# Altium PCB LED_PCB.PcbDoc (part 2 of 3)
Units mil, origin at the board's own origin, x right, y up, seen from the top; angles counter-clockwise.
Board outline 8000 x 4000 mil, 2 copper layers (Top Layer, Bottom Layer); 186 components, 303 nets, 1412 pads, 346 vias.
Unrouted connection lines stored in the file: 5.
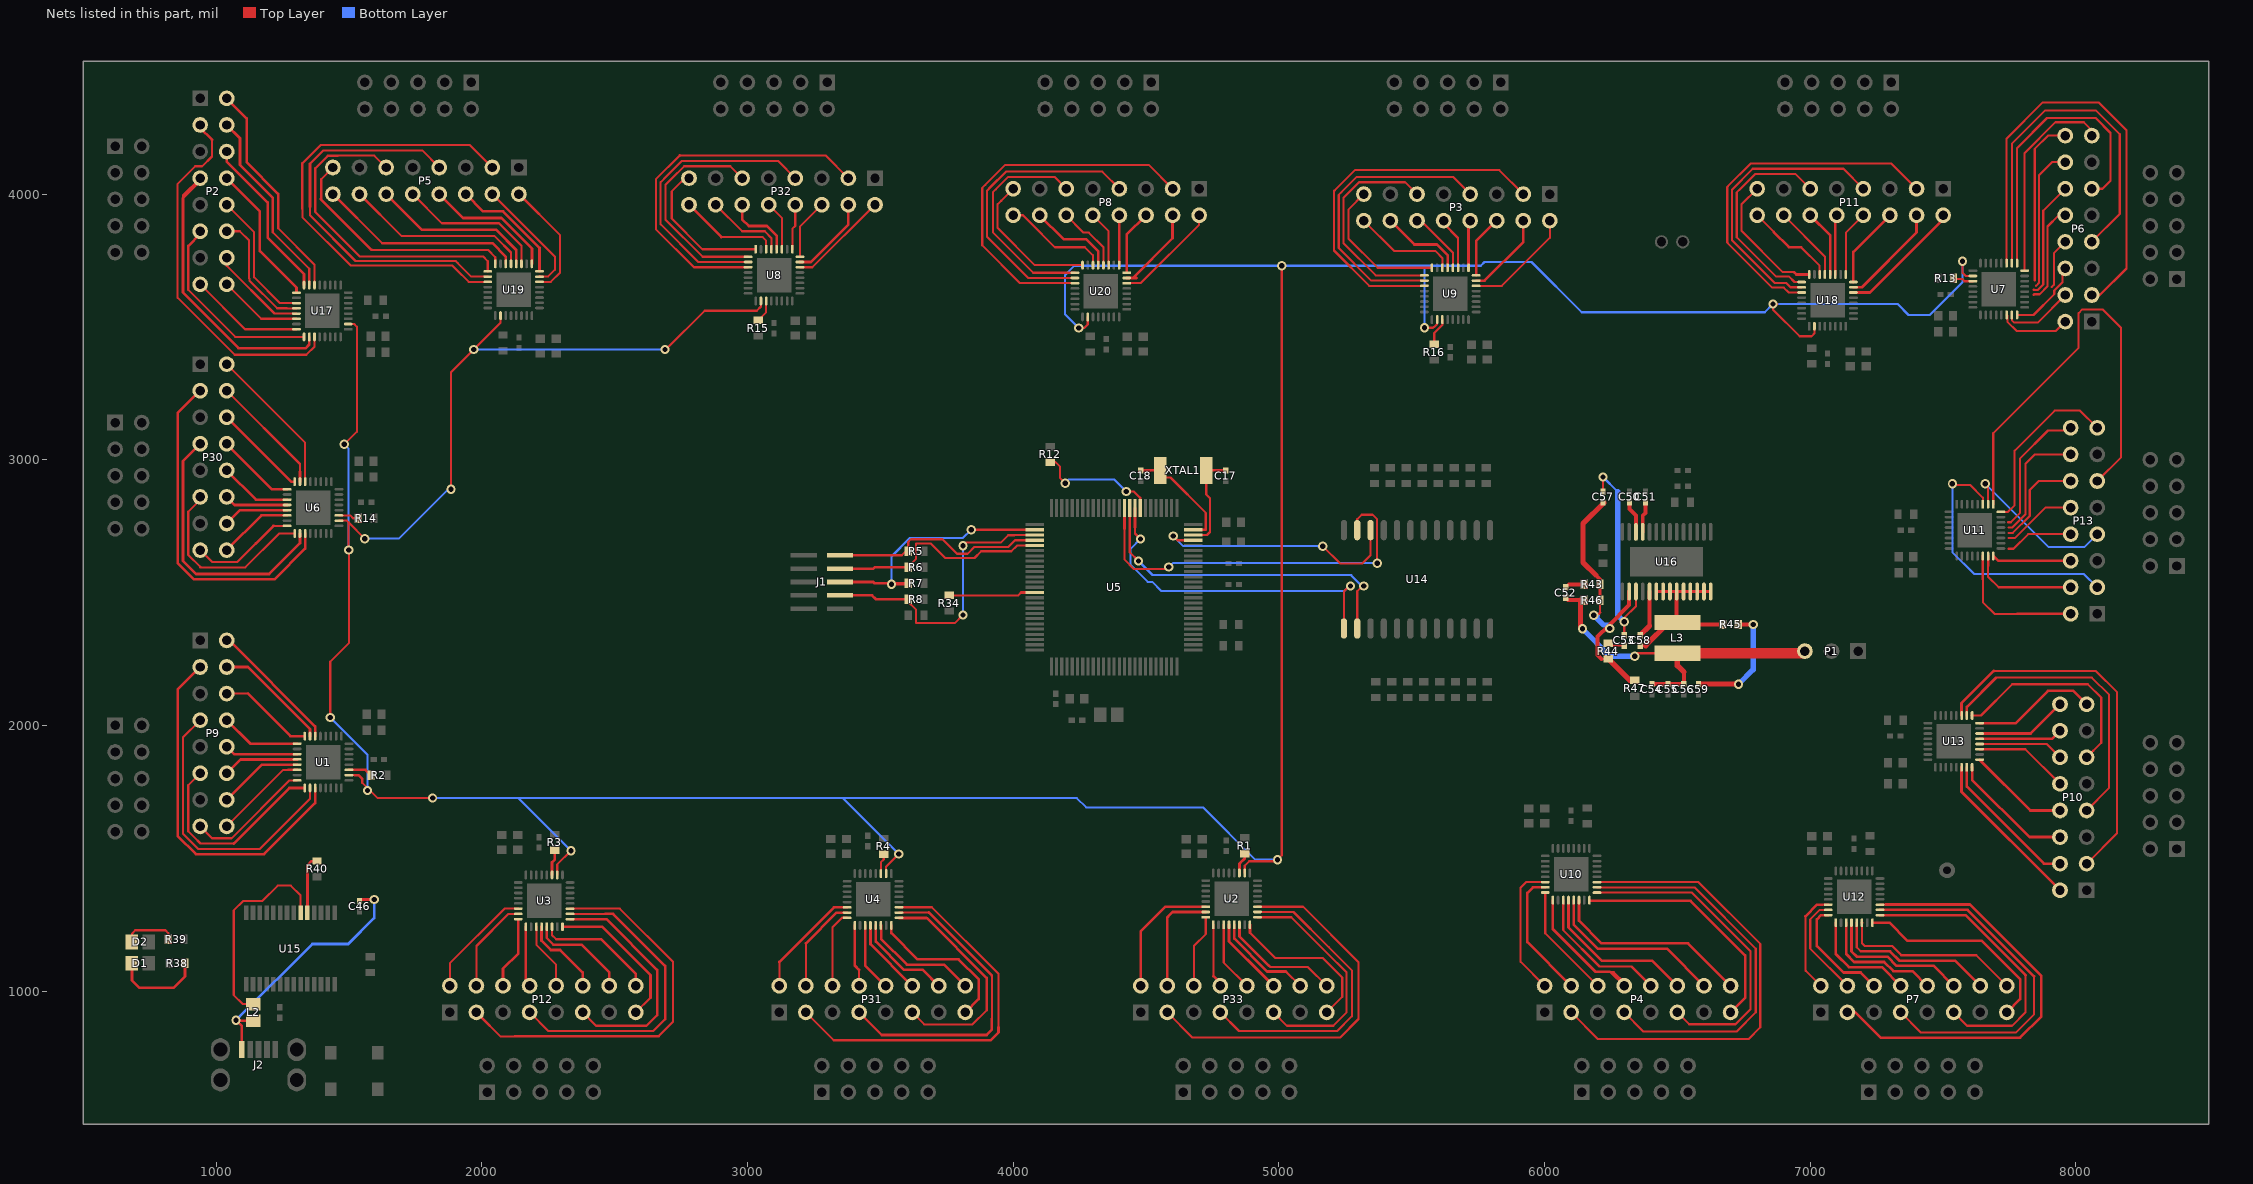
[diagram p2: the nets of this part, all layers, seen from the top]

## Via types
v1: diameter 35, hole 20, Top Layer to Bottom Layer, 334 vias
v2: diameter 25.98, hole 12.99, Top Layer to Bottom Layer, tented top, 12 vias

## Nets (pads, with @x,y where several pads share a name; then routed paths per layer and width w, separated by ;. In a path a pad name is that pad's centre, name@x,y a point inside that pad or via, vN(x,y) a via of type N, cw(c..) or ccw(c..) an arc to the next point about the centre after c; other vN are vias at no path point) (continued)
JTAG_TCK: J1.4 R6.1 U5.80 | length 850
  Top Layer w8: R6.1@3605.47,2595 3605.47,2598 3635,2627.53 3635,2684.72 3690,2684.72 3744.34,2630.38 3854.5,2630.38 3879.68,2655.56 3992.89,2655.56 4014.81,2677.48 U5.80@4081.77,2677.48
  Top Layer w10: J1.4@3348.11,2590.39 3474,2590.39 3478.61,2595 R6.1@3605.47,2595
JTAG_TDI: J1.8 R8.1 U5.78 | length 1219.6
  Top Layer w8: J1.8@3348.11,2489.61 3469,2489.61 ; R8.1@3600.24,2469.76 3635,2435 3635,2385.28 3780.28,2385.28 v1(3811,2416) ; v1(3811,2676) 3823,2688 3953,2688 3981,2716 4005.15,2716 4006,2716.85 U5.78@4081.77,2716.85
  Top Layer w10: J1.8@3348.11,2489.61 3469,2489.61 3483.61,2475 R8.1@3605.47,2475
  Bottom Layer w8: v1(3811,2416) v1(3811,2676)
JTAG_TDO: J1.6 R7.1 U5.77 | length 1013.3
  Top Layer w8: v1(3542,2531) 3605.47,2531 R7.1@3605.47,2535 ; v1(3841.91,2736.54) U5.77@4081.77,2736.54
  Top Layer w10: J1.6@3348.11,2540 3474,2540 3479,2535 3542,2535 R7.1@3605.47,2535
  Bottom Layer w8: v1(3542,2531) 3542,2636 3611.5,2705.5 3810.87,2705.5 v1(3841.91,2736.54)
JTAG_TMS: J1.2 R5.1 U5.79 | length 817.7
  Top Layer w8: J1.2@3348.11,2640.79 3580.79,2640.79 3605,2665 3605,2689.28 3604.28,2690 3615,2700.72 3734.33,2700.72 3788.67,2646.38 3828.88,2646.38 3854.06,2671.56 3981.36,2671.56 4006.97,2697.17 U5.79@4081.77,2697.17
LED_BLUE_0: P2.4 U17.7 | length 932
  Top Layer w8: P2.4@1040,4260 1090,4210 ; 1213.99,3986.01 1213.99,3856.01 1350.79,3719.21 U17.7@1350.79,3657.44
  Top Layer w10: P2.4@1040,4260 1090,4210 1090,4110 1213.99,3986.01 1213.99,3856.01
LED_BLUE_1: P2.8 U17.9 | length 539.9
  Top Layer w10: P2.8@1040,4060 1165,3935 1165,3785 1302.56,3647.44 U17.9@1302.56,3628.9
LED_BLUE_2: P2.12 U17.12 | length 506.1
  Top Layer w8: P2.12@1040,3860 1089.77,3860 1124.5,3825.27 1124.5,3797.78 1124,3797.28 1124,3683.37 1125.53,3681.84 1125.53,3674.47 1230,3570 1230.16,3569.84 1265.16,3569.84 U17.12@1302.56,3569.84
  Top Layer w10: 1230,3570 1265,3570 1265.16,3569.84
LED_BLUE_3: P2.16 U17.14 | length 316.2
  Top Layer w8: P2.16@1040,3660 1169.53,3530.47 U17.14@1302.56,3530.47
LED_BLUE_4: P5.4 U19.7 | length 455
  Top Layer w8: P5.4@2040,4000 2275,3765 2275,3715 2250,3690 2249.21,3689.21 U19.7@2217.44,3689.21
  Top Layer w10: P5.4@2040,4000 P5.4@2043.28,4000 ; U19.7@2217.44,3689.21 U19.7@2218.23,3690
LED_BLUE_5: P5.8 U19.9 | length 634.7
  Top Layer w10: P5.8@1840,4000 1930,3910 ; 2073.28,3910 1930,3910 ; U19.9@2188.9,3737.44 2188.9,3795 2073.9,3910 1930,3910
LED_BLUE_6: P5.12 U19.12 | length 629.5
  Top Layer w10: P5.12@1640,4000 1775,3865 2055,3865 2129.84,3790.16 U19.12@2129.84,3737.44
LED_BLUE_7: P5.16 U19.14 | length 802.2
  Top Layer w8: P5.16@1440,4000 1625,3815 2039.69,3815 ; U19.14@2090.47,3737.44 2090.47,3764.53
  Top Layer w10: 2039.69,3815 2090.16,3764.53 2090.47,3764.53 U19.14@2090.47,3737.44
LED_BLUE_8: P8.4 U20.7 | length 468.3
  Top Layer w8: U20.7@4427.44,3684.21 4451.06,3684.21 4600,3833.15 P8.4@4600,3920
  Top Layer w10: 4451.06,3684.21 U20.7@4427.44,3684.21 4464.21,3684.21 ; 4600,3833.15 P8.4@4600,3920
LED_BLUE_9: P8.8 U20.9 | length 188
  Top Layer w10: U20.9@4398.9,3732.44 4398.9,3918.9 P8.8@4400,3920
LED_BLUE_10: P8.12 U20.12 | length 257.2
  Top Layer w8: P8.12@4200,3920 4265,3855 4285,3855 4339.84,3800.16 U20.12@4339.84,3732.44
LED_BLUE_11: P8.16 U20.14 | length 400.6
  Top Layer w8: P8.16@4000,3920 4037.03,3920 4061.56,3895.47 4157.03,3800 4270,3800 4300,3770 4300.47,3769.53 U20.14@4300.47,3732.44
  Top Layer w10: U20.14@4300,3732.91 U20.14@4300.47,3732.44
LED_BLUE_12: P11.4 U18.7 | length 387.8
  Top Layer w10: U18.7@7162.44,3649.21 7194.21,3649.21 7400,3855 P11.4@7400,3920
LED_BLUE_13: P11.8 U18.9 | length 249.9
  Top Layer w8: U18.9@7133.9,3697.44 7133.9,3853.9 P11.8@7200,3920
LED_BLUE_14: P11.12 U18.12 | length 253.6
  Top Layer w10: P11.12@7000,3920 7074.84,3845.16 U18.12@7074.84,3697.44
LED_BLUE_15: P11.16 U18.14 | length 346.5
  Top Layer w8: P11.16@6800,3920 6862.1,3857.9 ; 6965,3800 7035.47,3729.53 U18.14@7035.47,3697.44
  Top Layer w10: 6862.1,3857.9 6920,3800 6965,3800
LED_BLUE_16: P30.4 U6.7 | length 493.6
  Top Layer w8: P30.4@1040,3260 1315.79,2984.21 1315.79,2954.21 U6.7@1315.79,2917.44
  Top Layer w10: U6.7@1315.79,2917.44 1315.79,2954.21
LED_BLUE_17: P30.8 U6.9 | length 298.4
  Top Layer w10: P30.8@1040,3060 1211.1,2888.9 U6.9@1267.56,2888.9
LED_BLUE_18: P30.12 U6.12 | length 240.1
  Top Layer w10: P30.12@1040,2860 1070.16,2829.84 U6.12@1267.56,2829.84
LED_BLUE_19: P30.16 U6.14 | length 281.6
  Top Layer w10: P30.16@1040,2660 1170.47,2790.47 U6.14@1267.56,2790.47
LED_BLUE_20: P32.4 U8.7 | length 315.9
  Top Layer w10: U8.7@3197.44,3744.21 3239.21,3744.21 3380,3885 P32.4@3380,3960
LED_BLUE_21: P32.8 U8.9 | length 172.2
  Top Layer w8: U8.9@3168.9,3792.44 3168.9,3868.9 3180,3880 P32.8@3180,3960
LED_BLUE_22: P32.12 U8.12 | length 312.3
  Top Layer w8: U8.12@3109.84,3792.44 3109.84,3843.44
  Top Layer w10: P32.12@2980,3960 2980,3905 3005,3880 3073.28,3880 3109.84,3843.44 U8.12@3109.84,3792.44
LED_BLUE_23: P32.16 U8.14 | length 551
  Top Layer w8: P32.16@2780,3960 2901.82,3838.18 3056.82,3838.18 3060,3835 3070.47,3824.53 U8.14@3070.47,3792.44
  Top Layer w10: P32.16@2780,3960 2901.82,3838.18
LED_BLUE_24: P3.4 U9.7 | length 317.9
  Top Layer w10: U9.7@5742.44,3674.21 5774.21,3674.21 5920,3820 P3.4@5920,3900
LED_BLUE_25: P3.8 U9.9 | length 180.1
  Top Layer w10: U9.9@5713.9,3722.44 5713.9,3893.9 P3.8@5720,3900
LED_BLUE_26: P3.12 U9.12 | length 242.2
  Top Layer w8: P3.12@5520,3900 5535,3900 5654.84,3780.16 U9.12@5654.84,3722.44
LED_BLUE_27: P3.16 U9.14 | length 390.7
  Top Layer w8: P3.16@5320,3900 5435,3785 5590,3785 5615.47,3759.53 U9.14@5615.47,3722.44
LED_BLUE_28: P6.4 U7.7 | length 267.9
  Top Layer w8: U7.7@7758.74,3545 7758.74,3525.26 7768,3516 7856,3516 P6.4@7960,3620
LED_BLUE_29: P6.8 | length 192.8
  Top Layer w8: 7909,3650.36 7917,3658.36 7917,3777 ; 7917,3775 7917,3777 ; P6.8@7960,3820 7917,3777
LED_BLUE_30: P6.12 | length 440.9
  Top Layer w8: 7840,3640 7842.37,3640 7843.37,3639 7856.63,3639 7877,3659.37 7877,3937 P6.12@7960,4020
LED_BLUE_31: P6.16 | length 630.7
  Top Layer w8: 7845,3675 7845,4170 7895,4220 P6.16@7960,4220
LED_BLUE_32: P9.4 U1.7 | length 437.1
  Top Layer w10: P9.4@1040,2220 1120,2220 1353.54,1986.46 U1.7@1353.54,1959.68
LED_BLUE_33: P9.8 U1.9 | length 302.1
  Top Layer w10: P9.8@1040,2020 1128.86,1931.14 U1.9@1305.32,1931.14
LED_BLUE_34: P9.12 U1.12 | length 286.9
  Top Layer w10: P9.12@1040,1820 1092.09,1872.09 U1.12@1305.32,1872.09
LED_BLUE_35: P9.16 U1.14 | length 406
  Top Layer w8: P9.16@1040,1620 1252.72,1832.72 1272.72,1832.72 U1.14@1305.32,1832.72
  Top Layer w10: P9.16@1040,1620 P9.16@1060,1620 ; 1272.72,1832.72 U1.14@1305.32,1832.72
LED_BLUE_36: P12.4 U3.7 | length 357.6
  Top Layer w8: P12.4@1980,1020 1980,1170 2100.79,1290.79 U3.7@2137.56,1290.79
LED_BLUE_37: P12.8 U3.9 | length 228.3
  Top Layer w10: U3.9@2166.1,1242.56 2166.1,1033.9 P12.8@2180,1020
LED_BLUE_38: P12.12 U3.12 | length 307.2
  Top Layer w10: U3.12@2225.16,1242.56 2225.16,1189.84 2260,1155 2295,1155 2380,1070 P12.12@2380,1020
LED_BLUE_39: P12.16 U3.14 | length 577.8
  Top Layer w8: U3.14@2264.53,1242.56 2264.53,1210.47 2280,1195 2405,1195
  Top Layer w10: 2280,1195 2405,1195 2450,1195 2580,1065 P12.16@2580,1020
LED_BLUE_40: P31.4 U4.7 | length 566.4
  Top Layer w8: P31.4@3220,1020 3220,1180 3335.47,1295.47 3335.79,1295.79 U4.7@3375.32,1295.79
  Top Layer w10: 3220,1180 3335.47,1295.47 U4.7@3375.32,1295.47
LED_BLUE_41: P31.8 U4.9 | length 408.6
  Top Layer w8: U4.9@3403.86,1247.56 3403.86,1096.14 3420,1080 P31.8@3420,1020
  Top Layer w10: U4.9@3403.62,1247.56 3403.62,1096.38 3403.86,1096.14 3420,1080
LED_BLUE_42: P31.12 U4.12 | length 292.8
  Top Layer w10: U4.12@3462.91,1247.56 3463.23,1247.56 3463.23,1176.77 P31.12@3620,1020
LED_BLUE_43: P31.16 U4.14 | length 441.7
  Top Layer w10: U4.14@3502.28,1247.56 3503.23,1247.56 3503.23,1196.77 3600,1100 3740,1100 P31.16@3820,1020
LED_BLUE_44: P33.4 U2.7 | length 410.8
  Top Layer w10: P33.4@4580,1020 4580,1277.72 4588.65,1286.37 4600,1297.72 U2.7@4724.8,1297.72
LED_BLUE_45: P33.8 U2.9 | length 230.8
  Top Layer w8: 4753.35,1056.65 U2.9@4753.35,1249.8
  Top Layer w10: 4753.35,1056.65 P33.8@4780,1030
LED_BLUE_46: P33.12 U2.12 | length 410.8
  Top Layer w8: 4812.4,1187.6 U2.12@4812.4,1249.8 ; 4945.07,1054.93 P33.12@4980,1020
  Top Layer w10: U2.12@4812.4,1249.8 4812.4,1187.6 4945.07,1054.93 P33.12@4980,1020
LED_BLUE_47: P33.16 U2.14 | length 492.3
  Top Layer w8: 4851.77,1206.2 U2.14@4851.77,1249.8 ; 4963.28,1095 4967.36,1090.93 5109.07,1090.93 P33.16@5180,1020
  Top Layer w10: U2.14@4852.09,1249.8 4852.09,1206.2 4963.28,1095
LED_BLUE_48: P4.4 U10.7 | length 494.5
  Top Layer w10: U10.7@6002.56,1390.79 5955.79,1390.79 5935,1370 5935,1185 P4.4@6100,1020
LED_BLUE_49: P4.8 U10.9 | length 870
  Top Layer w8: U10.9@6031.1,1342.56 6031.1,1233.9 6031.1,1232 6190.1,1073 6192,1073 6247,1073 6250,1070 P4.8@6300,1020
  Top Layer w10: U10.9@6031.1,1342.56 6031.1,1233.9 6192,1073 ; 6250,1070 6260,1070 P4.8@6300,1030
LED_BLUE_50: P4.12 U10.12 | length 603.6
  Top Layer w10: U10.12@6090.16,1342.56 6090.16,1239.84 6215,1115 6405,1115 P4.12@6500,1020
LED_BLUE_51: P4.16 U10.14 | length 749.2
  Top Layer w10: U10.14@6129.53,1342.56 6129.53,1265.47 6215,1180 6540,1180 P4.16@6700,1020
LED_BLUE_52: P7.4 U12.7 | length 390.4
  Top Layer w8: U12.7@7067.56,1305.79 7035.79,1305.79 7000,1270 7000,1160 P7.4@7140,1020
LED_BLUE_53: P7.8 U12.9 | length 411.8
  Top Layer w10: U12.9@7096.1,1257.56 7096.1,1138.9 7145,1090 7270,1090 P7.8@7340,1020
LED_BLUE_54: P7.12 U12.12 | length 546.3
  Top Layer w10: U12.12@7155.16,1257.56 7155.16,1149.84 7175,1130 7290,1130 7325,1095 7465,1095 P7.12@7540,1020
LED_BLUE_55: P7.16 U12.14 | length 689.7
  Top Layer w8: U12.14@7194.53,1257.56 7194.53,1180.47 7205,1170 7308.28,1170 7343.28,1135 ; 7625,1135 P7.16@7740,1020
  Top Layer w10: U12.14@7194.53,1257.56 U12.14@7195,1257.09 ; 7343.28,1135 7625,1135
LED_BLUE_56: P10.4 U13.7 | length 543.2
  Top Layer w10: U13.7@7589.21,1842.56 7589.53,1842.56 7589.53,1770.47 7880,1480 P10.4@7940,1480
LED_BLUE_57: P10.8 U13.9 | length 381.9
  Top Layer w10: U13.9@7637.44,1871.1 7637.44,1870.87 7828.31,1680 P10.8@7940,1680
LED_BLUE_58: P10.12 U13.12 | length 323.3
  Top Layer w8: U13.12@7637.44,1930.16 7679.84,1930.16 7889.84,1930.16 P10.12@7940,1880
LED_BLUE_59: P10.16 U13.14 | length 348.3
  Top Layer w10: U13.14@7637.44,1969.53 7829.53,1969.53 P10.16@7940,2080
LED_BLUE_60: P13.4 U11.7 | length 672
  Top Layer w8: U11.7@7669.21,2637.56 7669.21,2560 7709.21,2520 7750,2520 P13.4@7980,2520
  Top Layer w10: 7669.53,2600.47 U11.7@7669.53,2637.56 ; 7750,2520 P13.4@7980,2520
LED_BLUE_61: P13.8 | length 256.6
  Top Layer w8: 7746.17,2665 7765,2665 7820,2720 P13.8@7980,2720
LED_BLUE_62: P13.12 | length 371.8
  Top Layer w8: 7746.17,2725 7762.63,2725 7826,2788.37 7826,2886 7860,2920 P13.12@7980,2920
LED_BLUE_63: P13.16 | length 502.1
  Top Layer w8: 7745,2765 7755,2765 7790,2800 7790,3005 7895,3110 7970,3110 P13.16@7980,3120
LED_GREEN_0: P2.3 U17.19 | length 1391.1
  Top Layer w8: 984.53,4204.53 984.53,4141.56 947.5,4104.53 921.56,4104.53 855.47,4038.44 855.47,3609.53 1070,3395 1340,3395 1370.47,3425.47 U17.19@1370.47,3462.56
  Top Layer w10: P2.3@940,4260 940,4249.06 984.53,4204.53
LED_GREEN_1: P2.7 U17.18 | length 1789
  Top Layer w8: P2.7@940,4060 875.47,3995.47 875.47,3984.53 875.47,3629.53 1071.98,3433.02 ; 1350.79,3433.02 U17.18@1350.79,3462.56
  Top Layer w10: P2.7@940,4060 940,4049.06 875.47,3984.53 875.47,3629.53 1071.98,3433.02 1084.21,3420.79 ; 1084.21,3420 1337.77,3420 1350.79,3433.02
LED_GREEN_2: P2.11 U17.17 | length 912.8
  Top Layer w8: 895.47,3804.53 895.47,3639.53 1072.44,3462.56 U17.17@1331.1,3462.56
  Top Layer w10: 895.47,3639.53 895.47,3804.53 940,3849.06 P2.11@940,3860
LED_GREEN_3: P2.15 U17.16 | length 432.5
  Top Layer w8: P2.15@940,3660 1108.9,3491.1 U17.16@1302.56,3491.1
LED_GREEN_4: P5.3 U19.19 | length 1949.1
  Top Layer w8: U19.19@2022.56,3669.53 1950.47,3669.53 1902.07,3717.93 1889,3731 1539,3731 1507.29,3731 1325,3913.29 1325,3945 1325,4115 1394.53,4184.53 1955.47,4184.53 P5.3@2040,4100
  Top Layer w10: 1325,3945 1325,4115
LED_GREEN_5: P5.7 U19.18 | length 1654.7
  Top Layer w8: P5.7@1840,4100 1775.47,4164.53 1404.53,4164.53 1353.44,4113.44 1353.44,3951.56 1353.44,3919.59 1525.03,3748 1557,3748 1902,3748 1910,3740 1960.79,3689.21 U19.18@2022.56,3689.21
  Top Layer w10: 1353.44,3951.56 1353.44,4113.44
LED_GREEN_6: P5.11 U19.17 | length 1404.9
  Top Layer w8: P5.11@1640,4100 1595.47,4144.53 1458.44,4144.53 1421.56,4144.53 1373.44,4096.42 1373.44,3961.56 1373.44,3932.57 1541.02,3765 1570,3765 2005,3765 2022.56,3747.44 U19.17@2022.56,3708.9
  Top Layer w10: 1373.44,3961.56 1373.44,4096.42 ; 1421.56,4144.53 1458.44,4144.53
LED_GREEN_7: P5.15 U19.16 | length 1279.5
  Top Layer w8: P5.15@1440,4100 1395.47,4055.47 1395.47,3979.53 1585,3790 2023.69,3790 2051.1,3762.58 U19.16@2051.1,3737.44
  Top Layer w10: 1393.44,3981.56 1395.47,3979.53 1585,3790 ; 1395.47,3981.56 1395.47,4055.47 ; U19.16@2051.1,3737.44 2051.1,3762.58
LED_GREEN_8: P8.3 U20.19 | length 1413.9
  Top Layer w8: U20.19@4232.56,3664.53 4100.47,3664.53 4025.8,3664.53 3883.66,3806.67 3883.66,4023.2 3895,4034.54 3970.46,4110 4510,4110 P8.3@4600,4020
LED_GREEN_9: P8.7 U20.18 | length 1123.2
  Top Layer w8: U20.18@4232.56,3684.21 4115.79,3684.21 4057.3,3684.21 3901.66,3839.86 3901.66,4012.91 3915,4026.26 3973.27,4084.53 4335.47,4084.53 P8.7@4400,4020
LED_GREEN_10: P8.11 U20.17 | length 841.6
  Top Layer w8: P8.11@4200,4020 4155.47,4064.53 3981.56,4064.53 3935,4017.97 3923.47,4006.44 3923.47,3856 4075.57,3703.9 4124.85,3703.9 U20.17@4232.56,3703.9
LED_GREEN_11: P8.15 U20.16 | length 549.7
  Top Layer w8: P8.15@4000,4020 3955,3975 3941.47,3961.47 3941.47,3872 4081.03,3732.44 4187.44,3732.44 U20.16@4261.1,3732.44
LED_GREEN_12: P11.3 U18.19 | length 1355.8
  Top Layer w8: U18.19@6967.56,3629.53 6919.02,3629.53 6900.55,3648 6857,3648 6690,3815 6687.47,3817.53 6687.47,4027.01 6690,4029.54 6775.46,4115 7305,4115 P11.3@7400,4020
LED_GREEN_13: P11.7 U18.18 | length 1084.4
  Top Layer w8: U18.18@6967.56,3649.21 6925.79,3649.21 6910,3665 6865.94,3665 6705.47,3825.47 6705.47,4016.73 6783.74,4095 7125,4095 P11.7@7200,4020
LED_GREEN_14: P11.11 U18.17 | length 810.7
  Top Layer w8: U18.17@6967.56,3668.9 6940.55,3668.9 6919.45,3690 6870.7,3690 6723.47,3837.22 6723.47,4006.44 6735.47,4018.44 6792.03,4075 6945,4075 P11.11@7000,4020
LED_GREEN_15: P11.15 U18.16 | length 547.3
  Top Layer w8: P11.15@6800,4020 6741.47,3961.47 6741.47,3861.47 6896.95,3706 6939,3706 ; 6965.11,3697.44 U18.16@6996.1,3697.44
  Top Layer w10: P11.15@6800,4009.06 P11.15@6800,4020 ; 6939,3706 6947.56,3697.44 6965.11,3697.44 U18.16@6996.1,3697.44
LED_GREEN_16: P30.3 U6.19 | length 1294.1
  Top Layer w10: P30.3@940,3260 855.47,3175.47 855.47,2611.24 916.72,2550 1220,2550 1335.47,2665.47 U6.19@1335.47,2722.56
LED_GREEN_17: P30.7 U6.18 | length 1012.8
  Top Layer w10: P30.7@940,3060 875.47,2995.47 875.47,2619.53 925,2570 1200,2570 1315.79,2685.79 U6.18@1315.79,2722.56
LED_GREEN_18: P30.11 U6.17 | length 713.7
  Top Layer w8: P30.11@940,2860 940,2849.06 895.47,2804.53 895.47,2641.56 940,2597.03 942.03,2595 1110,2595 1237.56,2722.56 U6.17@1296.1,2722.56
  Top Layer w10: 940,2597.03 940,2595 942.03,2595
LED_GREEN_19: P30.15 U6.16 | length 402.2
  Top Layer w8: P30.15@940,2660 984.53,2615.47 1080.47,2615.47 1150,2685 ; 1216.1,2751.1 U6.16@1267.56,2751.1
  Top Layer w10: 1150,2685 1216.1,2751.1
LED_GREEN_20: P32.3 U8.19 | length 1392.1
  Top Layer w8: U8.19@3002.56,3724.53 2867.65,3724.53 2798.74,3724.53 2655.2,3868.07 2655.2,4055.2 2745,4145 3295,4145 P32.3@3380,4060
  Top Layer w10: 2745,4144.54 2745,4145 ; 2867.65,3724.53 2867.96,3724.21
LED_GREEN_21: P32.7 U8.18 | length 1113.2
  Top Layer w8: U8.18@3002.56,3744.21 2876.25,3744.21 2815.06,3744.21 2673.2,3886.07 2673.2,4044.46 2695.47,4066.73 2753.27,4124.53 3115.47,4124.53 P32.7@3180,4060
LED_GREEN_22: P32.11 U8.17 | length 835.9
  Top Layer w8: P32.11@2980,4060 2935.47,4104.53 2761.56,4104.53 2715.47,4058.44 2691.2,4034.18 2691.2,3904.07 2831.37,3763.9 2884.85,3763.9 U8.17@3002.56,3763.9
LED_GREEN_23: P32.15 U8.16 | length 583.9
  Top Layer w8: P32.15@2780,4075 2715,4010 2715,3907.94 2830.5,3792.44 U8.16@3031.1,3792.44
  Top Layer w10: P32.15@2780,4049.06 P32.15@2780,4075
LED_GREEN_24: P3.3 U9.19 | length 1401.5
  Top Layer w8: U9.19@5547.56,3654.53 5370.47,3654.53 5340.42,3654.53 5207.47,3787.47 5207.47,4011.54 5215.47,4019.54 5285.93,4090 5830,4090 P3.3@5920,4000
LED_GREEN_25: P3.7 U9.18 | length 1122.2
  Top Layer w8: U9.18@5547.56,3674.21 5400.79,3674.21 5347.93,3674.21 5225.47,3796.67 5225.47,3996.73 5235.47,4006.73 5293.27,4064.53 5655.47,4064.53 P3.7@5720,4000
LED_GREEN_26: P3.11 U9.17 | length 844.9
  Top Layer w8: P3.11@5520,4000 5475.47,4044.53 5301.56,4044.53 5255.47,3998.44 5243.47,3986.44 5243.47,3814.67 5364.24,3693.9 5421.1,3693.9 U9.17@5547.56,3693.9
LED_GREEN_27: P3.15 U9.16 | length 562.8
  Top Layer w8: P3.15@5320,4000 5261.47,3941.47 5261.47,3832.67 5371.7,3722.44 5427.56,3722.44 U9.16@5576.1,3722.44
  Top Layer w10: P3.15@5320,3989.06 P3.15@5320,4000
LED_GREEN_28: P6.3 U7.19 | length 1711.3
  Top Layer w8: U7.19@7739.06,3739.88 7739.06,4209.06 7875,4345 8085,4345 8190,4240 8190,3720 8090,3620 P6.3@8060,3620
LED_GREEN_29: P6.7 U7.18 | length 1398.9
  Top Layer w8: U7.18@7758.74,3739.88 7758.74,4015 ; 7758.74,4020.74 7758.74,4015 ; P6.7@8060,3820 8165,3925 8165,4225 8075,4315 7885,4315 7758.74,4188.74 7758.74,4015
LED_GREEN_30: P6.11 U7.17 | length 1123.4
  Top Layer w8: U7.17@7778.43,3739.88 7778.43,3930 ; 7778.43,3936 7778.43,3930 ; P6.11@8060,4020 8100,4020 8130,4050 8130,4230 8074,4286 7891,4286 7778.43,4173.43 7778.43,3930
LED_GREEN_31: P6.15 U7.16 | length 776.5
  Top Layer w8: U7.16@7806.97,3711.34 7806.97,4154.6 7922.37,4270 8030,4270 8060,4240 P6.15@8060,4220
LED_GREEN_32: P9.3 U1.19 | length 1353.6
  Top Layer w10: P9.3@940,2220 855.47,2135.47 855.47,1583.99 923.99,1515.47 1180.47,1515.47 1373.23,1708.23 U1.19@1373.23,1764.8
LED_GREEN_33: P9.7 U1.18 | length 1086.2
  Top Layer w8: P9.7@940,2020 875.47,1955.47 875.47,1944.53 875.47,1592.27 932.27,1535.47 1165.47,1535.47 1353.54,1723.54 U1.18@1353.54,1764.8
  Top Layer w10: P9.7@940,2009.06 P9.7@940,2020
LED_GREEN_34: P9.11 U1.17 | length 779.7
  Top Layer w8: 915.51,1581.51 895.47,1601.56 895.47,1775.47 P9.11@940,1820 ; 916.51,1580.51 941.56,1555.47 1066.73,1555.47
  Top Layer w10: 1066.73,1555.47 1276.06,1764.8 U1.17@1333.86,1764.8
LED_GREEN_35: P9.15 U1.16 | length 474
  Top Layer w8: P9.15@940,1620 984.53,1575.47 1021.56,1575.47 1058.44,1575.47 1276.32,1793.35 U1.16@1305.32,1793.35
LED_GREEN_36: P12.3 U3.19 | length 2106.4
  Top Layer w8: P12.3@1980,920 2030,870 2070,830 2125,830 2665,830 2720,885 2720,1110 2519.53,1310.47 U3.19@2332.44,1310.47
  Top Layer w10: P12.3@1980,920 2030,870 ; 2125,830 2665,830
LED_GREEN_37: P12.7 U3.18 | length 1368.1
  Top Layer w8: P12.7@2180,920 2250,850 2645,850 2690,895 2690,1066.8 ; U3.18@2332.44,1290.79 2466.01,1290.79
  Top Layer w10: 2466.01,1290.79 2494.21,1290.79 2690,1095 2690,1066.8 2690,895
LED_GREEN_38: P12.11 U3.17 | length 1146.7
  Top Layer w8: U3.17@2332.44,1271.1 2442,1271.1 ; P12.11@2380,920 2430,870 2620,870 2660,910 2660,1053.1
  Top Layer w10: U3.17@2332.44,1271.1 2442,1271.1 2468.9,1271.1 2660,1080 2660,1053.1 2660,910
LED_GREEN_39: P12.15 U3.16 | length 763
  Top Layer w8: U3.16@2303.9,1242.56 2432.44,1242.56 ; P12.15@2580,920 2635,975 2635,1040
  Top Layer w10: U3.16@2303.9,1242.56 2432.44,1242.56 2452.44,1242.56 2635,1060 2635,1040 2635,975
LED_GREEN_40: P31.3 U4.19 | length 1485
  Top Layer w8: P31.3@3220,920 3325,815 3330,815 ; U4.19@3570.2,1315.47 3570.51,1315.79 3694.21,1315.79 3945,1065 3945,864
  Top Layer w10: 3325,815 3915,815 3945,845 3945,864 ; U4.19@3570.2,1315.79 U4.19@3570.51,1315.79
LED_GREEN_41: P31.7 U4.18 | length 1530.8
  Top Layer w8: P31.7@3420,920 3505,835 ; U4.18@3570.2,1295.79 3682.5,1295.79 3920,1058.28 3920,896
  Top Layer w10: 3505,835 3900,835 3920,855 3920,896 ; 3682.5,1295.79 3920,1058.28
LED_GREEN_42: P31.11 U4.17 | length 1410.2
  Top Layer w8: U4.17@3570.2,1276.1 3673.9,1276.1 3675,1275 3900,1050 3900,928 3847,875 3665,875 P31.11@3620,920
  Top Layer w10: U4.17@3571.06,1275 3675,1275 3900,1050 3900,928
LED_GREEN_43: P31.15 U4.16 | length 575.1
  Top Layer w10: U4.16@3541.65,1247.56 3541.65,1218.35 3640,1120 3795,1120 3870,1045 3870,970 P31.15@3820,920
LED_GREEN_44: P33.3 U2.19 | length 1516.9
  Top Layer w8: P33.3@4580,920 4675,825 5230,825 5300,895 5300,1109.01 5091.3,1317.72 4967.29,1317.72 U2.19@4919.69,1317.72
  Top Layer w10: U2.19@4919.69,1318.03 4966.97,1318.03 4967.29,1317.72
LED_GREEN_45: P33.7 U2.18 | length 1166.4
  Top Layer w8: P33.7@4780,920 4850,850 5220,850 5275,905 5275,1078.28 5188.28,1165 5055.25,1298.03 4956.97,1298.03 U2.18@4919.69,1298.03
LED_GREEN_46: P33.11 U2.17 | length 888
  Top Layer w8: U2.17@4919.69,1278.35 5046.65,1278.35 5180,1145 5255,1070 5255,920 5205,870 5030,870 P33.11@4980,920
LED_GREEN_47: P33.15 U2.16 | length 632.6
  Top Layer w8: U2.16@4891.14,1249.8 4891.14,1220.13 4891.38,1219.89 4986.34,1124.93 5165.07,1124.93 5235,1055 5238.53,1051.47 5238.53,978.53 P33.15@5180,920
  Top Layer w10: 4891.38,1219.89 U2.16@4891.38,1249.8
LED_GREEN_48: P4.3 U10.19 | length 1796.5
  Top Layer w8: P4.3@6100,920 6200,820 6768,820 6812,864 6812,1178 6579.53,1410.47 U10.19@6197.44,1410.47
LED_GREEN_49: P4.7 U10.18 | length 1487.8
  Top Layer w8: U10.18@6197.44,1390.79 6564.21,1390.79 6795,1160 6795,920 6723,848 6372,848 P4.7@6300,920
LED_GREEN_50: P4.11 U10.17 | length 1204
  Top Layer w8: U10.17@6197.44,1371.1 6553.9,1371.1 6775,1150 6775,932.03 6718.44,875.47 6544.53,875.47 P4.11@6500,920
LED_GREEN_51: P4.15 U10.16 | length 911.4
  Top Layer w10: U10.16@6168.9,1342.56 6168.9,1340 6550,1340 6755,1135 6755,975 P4.15@6700,920
LED_GREEN_52: P7.3 U12.19 | length 1671
  Top Layer w8: U12.19@7262.44,1325.47 7281,1325.47
  Top Layer w10: P7.3@7140,920 7170,920 7265,825 7790,825 7870,905 7870,1056.57 7600.7,1325.87 7283.13,1325.87
LED_GREEN_53: P7.7 U12.18 | length 2072.1
  Top Layer w8: U12.18@7262.44,1305.79 7592.5,1305.79 7842.5,1055.78 7842.5,912.5 7775,845 7415,845 P7.7@7340,920
  Top Layer w10: U12.18@7262.44,1305.87 7592.42,1305.87 7592.5,1305.79 7842.5,1055.78
LED_GREEN_54: P7.11 U12.17 | length 1733.7
  Top Layer w8: U12.17@7262.44,1286.1 7583.9,1286.1 7584.13,1285.87 7810,1060 7810,920 7760,870 7590,870 P7.11@7540,920
  Top Layer w10: U12.17@7262.44,1285.87 7584.13,1285.87 7810,1060
LED_GREEN_55: P7.15 U12.16 | length 789.9
  Top Layer w10: U12.16@7233.9,1257.56 7297.44,1257.56 7365,1190 7645,1190 7790,1045 7790,970 P7.15@7740,920
LED_GREEN_56: P10.3 U13.19 | length 1625.8
  Top Layer w8: U13.19@7569.53,2037.44 7569.53,2084.53 7690,2205 8075,2205 8155,2125 8155,1595 P10.3@8040,1480
  Top Layer w10: U13.19@7569.21,2037.44 7569.21,2084.21 7569.53,2084.53 7690,2205
LED_GREEN_57: P10.7 U13.18 | length 1299
  Top Layer w8: U13.18@7589.21,2037.44 7589.21,2069.21 7700,2180 8060,2180 8125,2115 8125,1765 P10.7@8040,1680
  Top Layer w10: U13.18@7589.21,2037.44 7589.21,2069.21 7700,2180
LED_GREEN_58: P10.11 U13.17 | length 803.5
  Top Layer w8: U13.17@7608.9,2037.44 7642.44,2037.44 7760,2155 8045,2155 8095,2105 8095,1935 8065,1905 P10.11@8040,1880
  Top Layer w10: U13.17@7608.9,2037.44 U13.17@7609.13,2037.44
LED_GREEN_59: P10.15 U13.16 | length 473.4
  Top Layer w10: U13.16@7637.44,2008.9 7773.9,2008.9 7895,2130 7990,2130 P10.15@8040,2080
LED_GREEN_60: P13.3 U11.19 | length 1016.9
  Top Layer w8: v1@7535,2905 7602,2905 7649.53,2857.47 U11.19@7649.53,2832.44
  Bottom Layer w8: v1(7535,2910) 7535,2652 7617,2570 8030,2570 P13.3@8080,2520
LED_GREEN_61: P13.7 U11.18 | length 622.1
  Top Layer w8: v1(7659,2910) 7669.21,2899.79 U11.18@7669.21,2832.44
  Bottom Layer w8: v1(7659,2910) 7898,2671 8031,2671 P13.7@8080,2720
LED_GREEN_62: P13.11 U11.17 | length 1660.6
  Top Layer w8: U11.17@7688.9,2832.44 7688.9,3100 8010,3421.1 8010,3552 8024,3566 8100,3566 8170,3496 8170,3010 P13.11@8080,2920
LED_GREEN_63: P13.15 U11.16 | length 667.5
  Top Layer w8: U11.16@7717.44,2803.9 7744,2803.9 7769,2828.9 7769,3034 7920,3185 8015,3185 P13.15@8080,3120
LED_MODE: U1.26 U2.26 U3.26 U4.26 U6.26 U7.26 U8.26 U9.26 U17.26 U18.26 U19.26 U20.26 | length 15842.3
  Top Layer w8: v1(1430,2030) 1430,2240 1500,2310 v1(1500,2660) ; U6.26@1462.44,2770.79 1492,2770.79 1499,2763.79 ; v1(1483,3058) 1530,3105 1530,3500.79 1520,3510.79 U17.26@1497.44,3510.79 ; v1@1499,2660 1499,2763.79 ; U1.26@1500.2,1813.03 1521.97,1813.03 ; 1550,1785 1608.36,1726.64 v1(1815,1726.64) ; v1(1559.79,2703) 1499,2763.79 ; v1(1884,2889) 1884,3329.21 2070.79,3516 U19.26@2070.79,3542.56 ; U3.26@2284.21,1437.44 2284.21,1477 v1(2336,1528.79) ; v1(2690,3415) 2693,3415 2839,3561 3035,3561 3050.79,3576.79 U8.26@3050.79,3597.56 ; U4.26@3521.97,1442.44 3521.97,1469 v1(3569,1516.03) ; v1(4247,3496) 4267.79,3496 4280.79,3509 U20.26@4280.79,3537.56 ; U2.26@4871.46,1444.68 4871.46,1472 4888.46,1489 4989,1489 v1(4995,1495) 5011,1511 v1(5011,3730) ; v1(5548,3497) 5580,3497 5582,3499 5584,3499 5595.79,3510.79 U9.26@5595.79,3527.56 ; v1(6860,3586) 6876,3586 6860,3570 6860,3565 6960,3465 7005,3465 7015.79,3475.79 U18.26@7015.79,3502.56 ; v1(7573,3747) 7573,3703.65 7585,3691.65 U7.26@7612.09,3691.65
  Top Layer w10: 1521.97,1813.03 1536.97,1813.03 1550,1800 1550,1785
  Bottom Layer w8: v1(1430,2030) 1570,1890 v1(1570,1755) ; v1(1483,3058) 1499,3042 v1@1499,2660 ; v1(1559.79,2703) 1688,2703 1874,2889 v1(1884,2889) ; v1@1824.64,1717 v1(1815,1726.64) 2138.15,1726.64 ; v1(1970,3415) v1(2690,3415) ; v1(2336,1528.79) 2138.15,1726.64 ; 3360.02,1725.02 v1(3569,1516.03) ; v1(4247,3496) 4195,3548 4195,3695 4230,3730 v1(5011,3730) 5760,3730 5774.23,3744.23 5950.77,3744.23 6140,3555 6829,3555 v1(6860,3586) 7329,3586 7370,3545 7450,3545 7573,3668 v1(7573,3747) ; v1(4995,1495) 4911,1495 4714.49,1691.51 4274.49,1691.51 4239.36,1726.64 2138.15,1726.64 ; v1(5548,3497) 5548,3727
LED_RED_0: P2.2 U17.6 | length 1075.5
  Top Layer w8: P2.2@1040,4360 1115,4285 ; 1233.99,4001.01 1233.99,3871.01 1370.47,3734.53 U17.6@1370.47,3657.44
  Top Layer w10: P2.2@1040,4360 1115,4285 1115,4120 1233.99,4001.01 1233.99,3871.01
LED_RED_1: P2.6 U17.8 | length 991.3
  Top Layer w8: 1193.99,3968.99 1193.99,3836.01 1330.79,3699.21 1331.1,3698.9 U17.8@1331.1,3657.44
  Top Layer w10: P2.6@1040,4160 1040,4122.97 1193.99,3968.99 1193.99,3836.01 1330.79,3699.21 U17.8@1330.79,3657.44
LED_RED_2: P2.10 U17.11 | length 515.6
  Top Layer w8: P2.10@1040,3960 1143.53,3856.47 1143.53,3686.47 1240.47,3589.53 U17.11@1302.56,3589.53
LED_RED_3: P2.14 U17.13 | length 366.9
  Top Layer w8: P2.14@1040,3760 1040,3730.32 1220.16,3550.16 U17.13@1302.56,3550.16
LED_RED_4: P5.2 U19.6 | length 451.5
  Top Layer w8: P5.2@2140,4000 2295,3845 2295,3780 2295,3705 2259.53,3669.53 U19.6@2217.44,3669.53
LED_RED_5: P5.6 U19.8 | length 450
  Top Layer w10: P5.6@1940,4000 2005,3935 2080,3935 2217.44,3797.56 U19.8@2217.44,3708.9
LED_RED_6: P5.10 U19.11 | length 558.1
  Top Layer w8: P5.10@1740,4000 1850,3890 2065,3890 2149.53,3805.47 U19.11@2149.53,3737.44
LED_RED_7: P5.14 U19.13 | length 703.8
  Top Layer w8: P5.14@1540,4000 1698.5,3841.5 2048.66,3841.5 2055.16,3835 2110.16,3780 U19.13@2110.16,3737.44
LED_RED_8: P8.2 U20.6 | length 398.9
  Top Layer w8: U20.6@4427.44,3664.53 4479.53,3664.53 4700,3885 P8.2@4700,3920
LED_RED_9: P8.6 U20.8 | length 246.2
  Top Layer w10: U20.8@4427.44,3703.9 4427.44,3847.44 P8.6@4500,3920
LED_RED_10: P8.10 U20.11 | length 212.2
  Top Layer w8: P8.10@4300,3920 4359.53,3860.47 U20.11@4359.53,3732.44
LED_RED_11: P8.14 U20.13 | length 335.9
  Top Layer w10: P8.14@4100,3920 4190,3830 4275,3830 4320.16,3784.84 U20.13@4320.16,3732.44 U20.13@4320.16,3739.84
LED_RED_12: P11.2 U18.6 | length 513.8
  Top Layer w8: U18.6@7162.44,3629.53 7209.53,3629.53
  Top Layer w10: U18.6@7162.44,3629.53 7209.53,3629.53 7224.53,3629.53 7500,3905 P11.2@7500,3920
LED_RED_13: P11.6 U18.8 | length 308.1
  Top Layer w10: U18.8@7162.44,3668.9 7162.44,3782.44 P11.6@7300,3920
LED_RED_14: P11.10 U18.11 | length 224.8
  Top Layer w10: U18.11@7094.53,3697.44 7094.53,3914.53 P11.10@7100,3920
LED_RED_15: P11.14 U18.13 | length 286.8
  Top Layer w8: P11.14@6900,3920 7055.16,3764.84 U18.13@7055.16,3697.44
LED_RED_16: P30.2 U6.6 | length 575.9
  Top Layer w8: P30.2@1040,3360 1335.47,3064.53 1335.47,3053.58 U6.6@1335.47,2917.44
  Top Layer w10: P30.2@1040,3349.06 P30.2@1040,3360
LED_RED_17: P30.6 U6.8 | length 356.6
  Top Layer w10: P30.6@1040,3160 1282.56,2917.44 U6.8@1296.1,2917.44
LED_RED_18: P30.10 U6.11 | length 273.3
  Top Layer w10: P30.10@1040,2960 1150.47,2849.53 U6.11@1267.56,2849.53
LED_RED_19: P30.14 U6.13 | length 248.3
  Top Layer w10: P30.14@1040,2760 1090.16,2810.16 U6.13@1267.56,2810.16
LED_RED_20: P32.2 U8.6 | length 385.1
  Top Layer w8: U8.6@3197.44,3724.53 3244.53,3724.53 P32.2@3480,3960
  Top Layer w10: P32.2@3480,3955 P32.2@3480,3960
LED_RED_21: P32.6 U8.8 | length 238.6
  Top Layer w8: U8.8@3197.44,3763.9 3197.44,3869.16 3197.44,3877.44 P32.6@3280,3960
  Top Layer w10: P32.6@3280,3951.72 P32.6@3280,3960
LED_RED_22: P32.10 U8.11 | length 188.1
  Top Layer w8: P32.10@3080,3960 3129.53,3910.47 U8.11@3129.53,3792.44
LED_RED_23: P32.14 U8.13 | length 304.4
  Top Layer w8: P32.14@2880,3960 2980,3860 3065,3860 3090.16,3834.84 U8.13@3090.16,3792.44
LED_RED_24: P3.2 U9.6 | length 417.3
  Top Layer w8: U9.6@5742.44,3654.53 5839.53,3654.53 6020,3835 P3.2@6020,3900
LED_RED_25: P3.6 U9.8 | length 238.2
  Top Layer w10: U9.8@5742.44,3693.9 5742.44,3822.44 P3.6@5820,3900
LED_RED_26: P3.10 U9.11 | length 200.1
  Top Layer w8: P3.10@5620,3900 5620,3889.06 5674.53,3834.53 U9.11@5674.53,3722.44
LED_RED_27: P3.14 U9.13 | length 316.7
  Top Layer w10: P3.14@5420,3900 5510,3810 5595.32,3810 5635.16,3770.16 U9.13@5635.16,3722.44
LED_RED_28: P6.2 U7.6 | length 273.6
  Top Layer w8: U7.6@7739.06,3545 7741.82,3542.24 7741.82,3519.55 7776.43,3484.94 7924.94,3484.94 P6.2@7960,3520
LED_RED_29: P6.6 U7.8 | length 286.3
  Top Layer w8: U7.8@7778.43,3545 7840,3545 7918.47,3623.47 7918.47,3637.2 7950,3668.73 7950,3710 P6.6@7960,3720
LED_RED_30: P6.10 | length 376.2
  Top Layer w8: 7840,3620 7843,3623 7863.25,3623 7893,3652.75 7893,3878 7935,3920 P6.10@7960,3920
LED_RED_31: P6.14 | length 539.9
  Top Layer w8: 7850,3655 7861,3666 7861,4071 7910,4120 P6.14@7960,4120
LED_RED_32: P9.2 U1.6 | length 504.2
  Top Layer w10: P9.2@1040,2320 1050,2320 1373.23,1996.77 U1.6@1373.23,1959.68
LED_RED_33: P9.6 U1.8 | length 360.3
  Top Layer w8: P9.6@1040,2120 1120,2120
  Top Layer w10: 1120,2120 1280.32,1959.68 U1.8@1333.86,1959.68
LED_RED_34: P9.10 U1.11 | length 277
  Top Layer w10: P9.10@1040,1920 1068.23,1891.77 U1.11@1305.32,1891.77
LED_RED_35: P9.14 U1.13 | length 320.2
  Top Layer w10: P9.14@1040,1720 1172.4,1852.4 U1.13@1305.32,1852.4
LED_RED_36: P12.2 U3.6 | length 427.7
  Top Layer w8: P12.2@1880,1020 1880,1105 2085.47,1310.47 U3.6@2137.56,1310.47
LED_RED_37: P12.6 U3.8 | length 339.9
  Top Layer w8: P12.6@2080,1020 2080,1085
  Top Layer w10: P12.6@2080,1020 2080,1085 2137.56,1142.56 U3.8@2137.56,1271.1
LED_RED_38: P12.10 U3.11 | length 253.4
  Top Layer w8: U3.11@2205.47,1242.56 2205.47,1174.53 2280,1100 P12.10@2280,1020
LED_RED_39: P12.14 U3.13 | length 436.5
  Top Layer w8: U3.13@2244.84,1242.56 2244.84,1200.16 2270,1175 2325,1175
  Top Layer w10: 2270,1175 2325,1175 2375,1175 2480,1070 P12.14@2480,1020
LED_RED_40: P31.2 U4.6 | length 770.9
  Top Layer w8: P31.2@3120,1020 3120,1110 3325.47,1315.47 U4.6@3375.32,1315.47
  Top Layer w10: 3120,1110 3325.47,1315.47 U4.6@3375.32,1315.47
LED_RED_41: P31.6 U4.8 | length 290.3
  Top Layer w8: P31.6@3320,1020 3320,1240 3356.1,1276.1 U4.8@3375.32,1276.1
LED_RED_42: P31.10 U4.11 | length 410.1
  Top Layer w10: P31.10@3520,1020 3443.23,1096.77 ; 3443.23,1096.77 U4.11@3443.23,1247.56 3443.23,1096.77
LED_RED_43: P31.14 U4.13 | length 367.3
  Top Layer w10: U4.13@3482.6,1247.56 3483.23,1247.56 3483.23,1186.77 3590,1080 3660,1080 P31.14@3720,1020
LED_RED_44: P33.2 U2.6 | length 799
  Top Layer w8: P33.2@4480,1020 4480,1212 ; 4585.72,1317.72 U2.6@4724.8,1317.72
  Top Layer w10: P33.2@4480,1020 4480,1212 4480,1225 4572.72,1317.72 4704.51,1317.72
LED_RED_45: P33.6 U2.8 | length 276.9
  Top Layer w8: P33.6@4680,1020 4680,1170 4724.8,1214.8 U2.8@4724.8,1278.35
LED_RED_46: P33.10 U2.11 | length 266
  Top Layer w8: U2.11@4792.72,1249.8 4792.72,1107.28 P33.10@4880,1020
LED_RED_47: P33.14 U2.13 | length 445.1
  Top Layer w8: 4955,1072.93 5027.07,1072.93 P33.14@5080,1020
  Top Layer w10: 4832.09,1197.91 U2.13@4832.09,1249.8 ; 4832.4,1197.6 4956.07,1073.93 5026.07,1073.93 5027.07,1072.93
LED_RED_48: P4.2 U10.6 | length 508.3
  Top Layer w8: P4.2@6000,1020 5910,1110 5910,1390 5930,1410 5930.47,1410.47 5965.47,1410.47 U10.6@6002.56,1410.47
LED_RED_49: P4.6 U10.8 | length 432.9
  Top Layer w8: U10.8@6002.56,1371.1 6002.56,1217.44 P4.6@6200,1020
LED_RED_50: P4.10 U10.11 | length 628.3
  Top Layer w8: U10.11@6070.47,1342.56 6070.47,1229.53 6207,1093 6327,1093 6330,1090 P4.10@6400,1020
  Top Layer w10: 6330,1090 P4.10@6400,1020
LED_RED_51: P4.14 U10.13 | length 677.9
  Top Layer w10: U10.13@6109.84,1342.56 6109.84,1250.16 6200,1160 6460,1160 P4.14@6600,1020
LED_RED_52: P7.2 U12.6 | length 406.7
  Top Layer w8: 6981.5,1078.5 6981.5,1281.5 ; 6983,1077 P7.2@7040,1020 ; 7028.47,1325.47 U12.6@7067.56,1325.47
  Top Layer w10: 6981.5,1281.5 7025.47,1325.47 7047.26,1325.47
LED_RED_53: P7.6 U12.8 | length 426.4
  Top Layer w10: U12.8@7067.56,1286.1 7041.1,1286.1 7025,1270 7025,1170 7125,1070 7190,1070 P7.6@7240,1020
LED_RED_54: P7.10 U12.11 | length 538.8
  Top Layer w10: U12.11@7135.47,1257.56 7135.47,1140 7165.47,1110 7278.28,1110 7313.28,1075 7385,1075 ; 7318.03,1075 7385,1075 ; P7.10@7440,1020 7385,1075
LED_RED_55: P7.14 U12.13 | length 752
  Top Layer w8: U12.13@7174.84,1257.56 7174.84,1165.16 7190,1150 7300,1150 ; 7545,1115 P7.14@7640,1020
  Top Layer w10: 7300,1150 7335,1115 7545,1115 P7.14@7640,1020
LED_RED_56: P10.2 U13.6 | length 616
  Top Layer w10: U13.6@7569.53,1842.56 7569.53,1750.47 P10.2@7940,1380
LED_RED_57: P10.6 U13.8 | length 467.4
  Top Layer w10: U13.8@7608.9,1842.56 7609.53,1842.56 7609.53,1795.47 7825,1580 P10.6@7940,1580
LED_RED_58: P10.10 U13.11 | length 356.6
  Top Layer w8: U13.11@7637.44,1910.47 7669.53,1910.47 7809.53,1910.47 P10.10@7940,1780
LED_RED_59: P10.14 U13.13 | length 315
  Top Layer w10: U13.13@7637.44,1949.84 7909.84,1949.84 P10.14@7940,1980
LED_RED_60: P13.2 U11.6 | length 809.3
  Top Layer w8: U11.6@7649.53,2637.56 7649.53,2550.47 7649.53,2464 7693.53,2420 7780,2420 P13.2@7980,2420
  Top Layer w10: 7649.53,2550.47 U11.6@7649.53,2637.56 ; 7780,2420 P13.2@7980,2420
LED_RED_61: P13.6 U11.8 | length 298.4
  Top Layer w10: U11.8@7688.9,2637.56 7689.53,2637.56 7707.09,2620 P13.6@7980,2620
LED_RED_62: P13.10 | length 281.5
  Top Layer w8: 7746.17,2705 7770,2705 7885,2820 P13.10@7980,2820
LED_RED_63: P13.14 | length 459
  Top Layer w8: 7746.17,2745 7760,2745 7810,2795 7810,2985 7845,3020 P13.14@7980,3020
MUX_A: U5.47 U14.10 | length 970.8
  Top Layer w8: v1(4602,2713.17) 4618,2697.17 U5.47@4678.23,2697.17 ; v1(5165,2675) 5230,2610 5315,2610 5345,2640 U14.10@5345,2735.04
  Bottom Layer w8: v1(4602,2713.17) 4640.17,2675 5147,2675 v1@5156,2666
MUX_B: U5.61 U14.11 | length 1541.1
  Top Layer w8: U5.61@4419.37,2818.23 4419.37,2624 4454.37,2589 4579,2589 v1(4586,2596) ; U14.11@5295,2735.04 5295,2776 5312,2793 5353,2793 5370,2776 v1(5370,2611)
  Top Layer w10: 4419.37,2740.63 U5.61@4419.37,2818.23
  Bottom Layer w8: v1(4586,2596) 4601,2611 v1(5370,2611)
MUX_C: U5.60 U14.14 | length 1350.6
  Top Layer w8: U5.60@4439.06,2818.23 4439.06,2651.94 v1(4472,2619) ; U14.14@5295,2364.96 5295,2505 5306,2516 v1(5320,2525)
  Top Layer w10: 4439.06,2740.94 U5.60@4439.06,2818.23
  Bottom Layer w8: v1(4472,2619) 4524.5,2566.5 5272.36,2566.5 5272.36,2564.36 5311.72,2525 v1(5320,2525)
MUX_D: U5.59 U14.13 | length 1359.1
  Top Layer w8: U5.59@4458.74,2818.23 4458.74,2722.26 v1(4479,2702) ; U14.13@5245,2364.96 5245,2505 5265,2525 v1(5270,2525)
  Top Layer w10: 4458.74,2746.26 U5.59@4458.74,2818.23
  Bottom Layer w8: v1(4479,2702) 4442,2665 4442,2605 4506.5,2540.5 4523.04,2540.5 4557.54,2506 5246,2506 5265,2525 v1(5270,2525)
NetC17_2: C17.2 U5.48 XTAL1.1 | length 378.9
  Top Layer w8: U5.48@4678.23,2716.85 4729.85,2716.85 4741,2728 4741,2854.6 4726.61,2868.99 XTAL1.1@4726.61,2960
  Top Layer w10: XTAL1.1@4726.61,2960 4763,2960 4763.31,2959.69 C17.2@4800,2959.69
NetC18_2: C18.2 U5.49 XTAL1.2 | length 437.5
  Top Layer w8: XTAL1.2@4553.39,2960 4553.39,2933 4592,2933 4725,2800 4725,2736.54 U5.49@4678.23,2736.54
  Top Layer w10: C18.2@4480,2959.69 4516,2959.69 4516.31,2960 XTAL1.2@4553.39,2960
NetC46_2: C46.2 J2.1 L2.1 | length 972.3
  Top Layer w10: v1(1075,890) v1@1076.5,888.5 ; J2.1@1097.01,780 1097.01,867.99 v1@1076.5,888.5 ; L2.1@1140,888.5 v1@1076.5,888.5 ; C46.2@1540,1339.69 1545.31,1345 v1(1595,1345)
  Bottom Layer w10: v1@1087,902 1362.54,1177.54 1497.54,1177.54 1595,1275 v1(1595,1345)
NetC50_1: C50.1 U16.26 | length 156.1
  Top Layer w8: U16.26@6343.98,2728.58 6343.98,2763.02
  Top Layer w15: C50.1@6320,2840.32 6320,2815 6343.98,2791.02 U16.26@6343.98,2728.58
NetC51_1: C51.1 U16.25 | length 116.1
  Top Layer w15: U16.25@6369.57,2728.58 6369.57,2789.57 6380,2800 C51.1@6380,2840.32
NetC52_1: C52.1 C54.2 C55.2 C56.2 L3.2 P1.3 R46.2 | length 1370.6
  Top Layer w8: C52.1@6080,2480.32 C52.1@6088.94,2471.38 ; v1(6143,2364) v1@6149.61,2370.61 ; v1@6340,2271.75 L3.2@6500,2271.75 L3.2@6558,2271.75 ; P1.3@6971.75,2271.75 P1.3@6980,2280
  Top Layer w15: C52.1@6088.94,2471.38 R46.2@6149.61,2471.38 ; C54.2@6404.13,2156.06 C55.2@6464.13,2156.06 C56.2@6524.13,2156.06 6524.13,2201
  Top Layer w20: v1@6135,2370 6135,2470.77 ; L3.2@6500,2271.75 6500,2225.13 6524.13,2201
  Top Layer w40: L3.2@6500,2271.75 P1.3@6971.75,2271.75
  Bottom Layer w20: v1(6143,2364) 6247,2260 v1(6340,2260)
NetC52_2: C52.2 R43.2 | length 74.4
  Top Layer w8: C52.2@6080,2519.69 6091.69,2531.38
  Top Layer w15: 6091.69,2531.38 R43.2@6149.61,2531.38
NetC53_1: C53.1 C57.1 U16.3 | length 816.2
  Top Layer w8: C57.1@6220,2879.68 v1(6220,2935) ; C53.1@6300,2339.68 v1(6300,2390) 6300,2405 6343.98,2448.98 U16.3@6343.98,2504.17
  Bottom Layer w8: v1(6220,2935) 6275,2880
  Bottom Layer w20: 6275,2880 6275,2415 v1(6300,2390)
NetC53_2: C53.2 R44.1 | length 63.8
  Top Layer w8: R44.1@6240,2309.53 6249.21,2300.31 C53.2@6300,2300.31
NetC57_2: C57.2 R43.1 R44.2 R46.1 R47.2 U16.2 | length 1066.7
  Top Layer w8: v1(6185,2415) 6198.28,2415 6203,2419.72 6204.72,2419.72 6210,2425 6208.66,2426.34 R46.1@6208.66,2471.38 R46.1@6208.5,2471.22 ; 6214.53,2250.47 R44.2@6240,2250.47 ; v1@6240,2375 6245,2375 v1(6245,2365) ; 6320.94,2169.53 R47.2@6340,2169.53
  Top Layer w10: R46.1@6208.66,2471.38 R43.1@6208.66,2531.38
  Top Layer w15: 6192.66,2566 6208.66,2550 ; 6214.53,2250.47 6200,2265 6200,2335 6240,2375 6318.39,2453.39 U16.2@6318.39,2504.17
  Top Layer w20: 6192.66,2566 6145,2613.66 6145,2760 C57.2@6222.66,2837.66 ; R44.2@6240,2250.47 6320.94,2169.53
  Bottom Layer w8: v1(6245,2365) v1@6245,2377.72
  Bottom Layer w20: v1(6185,2415) 6198.28,2415 6191.64,2408.36 6222.28,2377.72 v1@6245,2377.72
NetC58_1: C58.1 U16.5 | length 179.5
  Top Layer w8: 6395,2375 6395.32,2375 ; 6395,2434.68 6395.16,2434.84
  Top Layer w15: 6395,2375 6395,2434.68 ; 6395.16,2434.84 U16.5@6395.16,2504.17
  Top Layer w20: C58.1@6360,2339.68 6395.32,2375
NetC58_2: C58.2 L3.1 R45.2 U16.6 U16.7 U16.8 U16.9 U16.10 U16.11 U16.12 U16.13 U16.14 | length 712.2
  Top Layer w8: C58.2@6360,2300.31 6380.31,2300.31 ; L3.1@6468.25,2388.25 6497.52,2388.25 L3.1@6500,2388.25 L3.1@6540,2388.25 ; L3.1@6548.25,2380 L3.1@6540,2388.25 ; L3.1@6581.28,2388.25 L3.1@6540,2388.25
  Top Layer w10: U16.6@6420.75,2504.17 U16.7@6446.34,2504.17 U16.8@6471.93,2504.17 U16.9@6497.52,2504.17 U16.10@6523.11,2504.17 U16.11@6548.7,2504.17 U16.12@6574.29,2504.17 U16.13@6599.88,2504.17 U16.14@6625.47,2504.17
  Top Layer w15: L3.1@6497.52,2388.25 U16.9@6497.52,2504.17 ; L3.1@6548.25,2380 R45.2@6670.47,2380
  Top Layer w20: 6380.31,2300.31 L3.1@6468.25,2388.25
NetC59_2: C59.2 R45.1 | length 454.6
  Top Layer w8: v1@6728.94,2156.06 v1(6730,2155)
  Top Layer w15: R45.1@6729.53,2380 v1(6785,2380)
  Top Layer w20: C59.2@6579.13,2156.06 v1@6728.94,2156.06
  Bottom Layer w20: v1(6730,2155) 6785,2210 v1(6785,2380)
NetD1_2: D1.2 R38.2 | length 343.7
  Top Layer w10: D1.2@683.5,1105 683.5,1040 711.22,1012.28 840.26,1012.28 883.03,1055.06 R38.2@883.03,1105
NetD2_2: D2.2 R39.2 | length 201.5
  Top Layer w8: D2.2@683.5,1185 683.5,1216.5 696,1229 810,1229 820.47,1218.53 R39.2@820.47,1195
NetD3_3: R40.2 U15.19 | length 221.7
  Top Layer w10: U15.19@1343.98,1294.45 1343.98,1473.5 1360,1489.53 R40.2@1380,1489.53
NetL2_2: L2.2 U15.20 | length 778
  Top Layer w8: L2.2@1140,951.5 1100,951.5 1066.5,985 1066.5,1304.13 1101.79,1339.42 1175,1339.42 1175,1339.81 1232.19,1397 1281.39,1397 1318.39,1360 U15.20@1318.39,1294.45
NetR1_2: R1.2 U2.27 | length 119.1
  Top Layer w8: U2.27@4851.77,1444.68 4851.77,1470.27 4852.09,1470.59 4853.68,1472.18 4853.68,1481.6
  Top Layer w10: U2.27@4852.09,1444.68 4852.09,1470.59 4852.09,1480 4853.68,1481.6 4872.24,1500.16 R1.2@4872.24,1517.72
NetR2_2: R2.2 U1.27 | length 91.5
  Top Layer w10: U1.27@1500.2,1832.72 1562.76,1832.72 R2.2@1583.23,1812.24
NetR3_2: R3.2 U3.27 | length 97.4
  Top Layer w10: U3.27@2264.53,1437.44 2264.53,1484.53 2275,1495 R3.2@2275,1530.47
NetR4_2: R4.2 U4.27 | length 77.4
  Top Layer w8: U4.27@3502.28,1442.44 3502.28,1485.19 3512.76,1495.66 R4.2@3512.76,1515.47
NetR12_1: R12.1 U5.58 | length 505.7
  Top Layer w8: R12.1@4140,2990.47 4160,2990.47 4177.02,2973.45 4177.02,2930.98 v1(4196,2912) ; v1(4426,2880.5) 4453.93,2880.5 4478.43,2856 U5.58@4478.43,2818.23
  Top Layer w10: U5.58@4478.43,2818.23 4478.43,2856
  Bottom Layer w8: v1(4196,2912) 4209.5,2925.5 4381,2925.5 v1(4426,2880.5)
NetR13_2: R13.2 U7.27 | length 78.5
  Top Layer w8: R13.2@7539.06,3682.44 7539.06,3680.57 7571.87,3680.57 7580.47,3671.97 U7.27@7612.09,3671.97
NetR14_2: R14.2 U6.27 | length 77.4
  Top Layer w8: U6.27@1462.44,2790.47 1505.19,2790.47 1515.66,2780 R14.2@1535.47,2780
NetR15_2: R15.2 U8.27 | length 85.7
  Top Layer w8: R15.2@3040,3524.53 3070.16,3554.69 3070.47,3555 U8.27@3070.47,3597.56
NetR16_2: R16.2 U9.27 | length 105.7
  Top Layer w8: R16.2@5585,3434.53 5585,3476.79 5615.47,3507.26 U9.27@5615.47,3527.56
NetR17_2: 
NetR17_2: 
NetR17_2: 
NetR17_2: 
NetR18_2: 
NetR18_2: 
NetR18_2: 
NetR18_2: 
NetR19_2: 
NetR19_2: 
NetR19_2: 
NetR19_2: 
NetR20_2: 
NetR20_2: 
NetR20_2: 
NetR20_2: 
NetR34_2: R34.2 U5.89 | length 378.2
  Top Layer w8: R34.2@3760,2489.53 4019.05,2489.53 4029.84,2500.31 U5.89@4081.77,2500.31
  Top Layer w10: 4029.84,2500.31 U5.89@4081.77,2500.31